# Altium PCB FATEK_OMRON_EXTENDED.PcbDoc
Units mil, origin at the board's own origin, x right, y up, seen from the top; angles counter-clockwise.
Board outline 1200 x 1975 mil, 2 copper layers (Top Layer, Bottom Layer); 5 components, 6 nets, 12 pads, 0 vias.
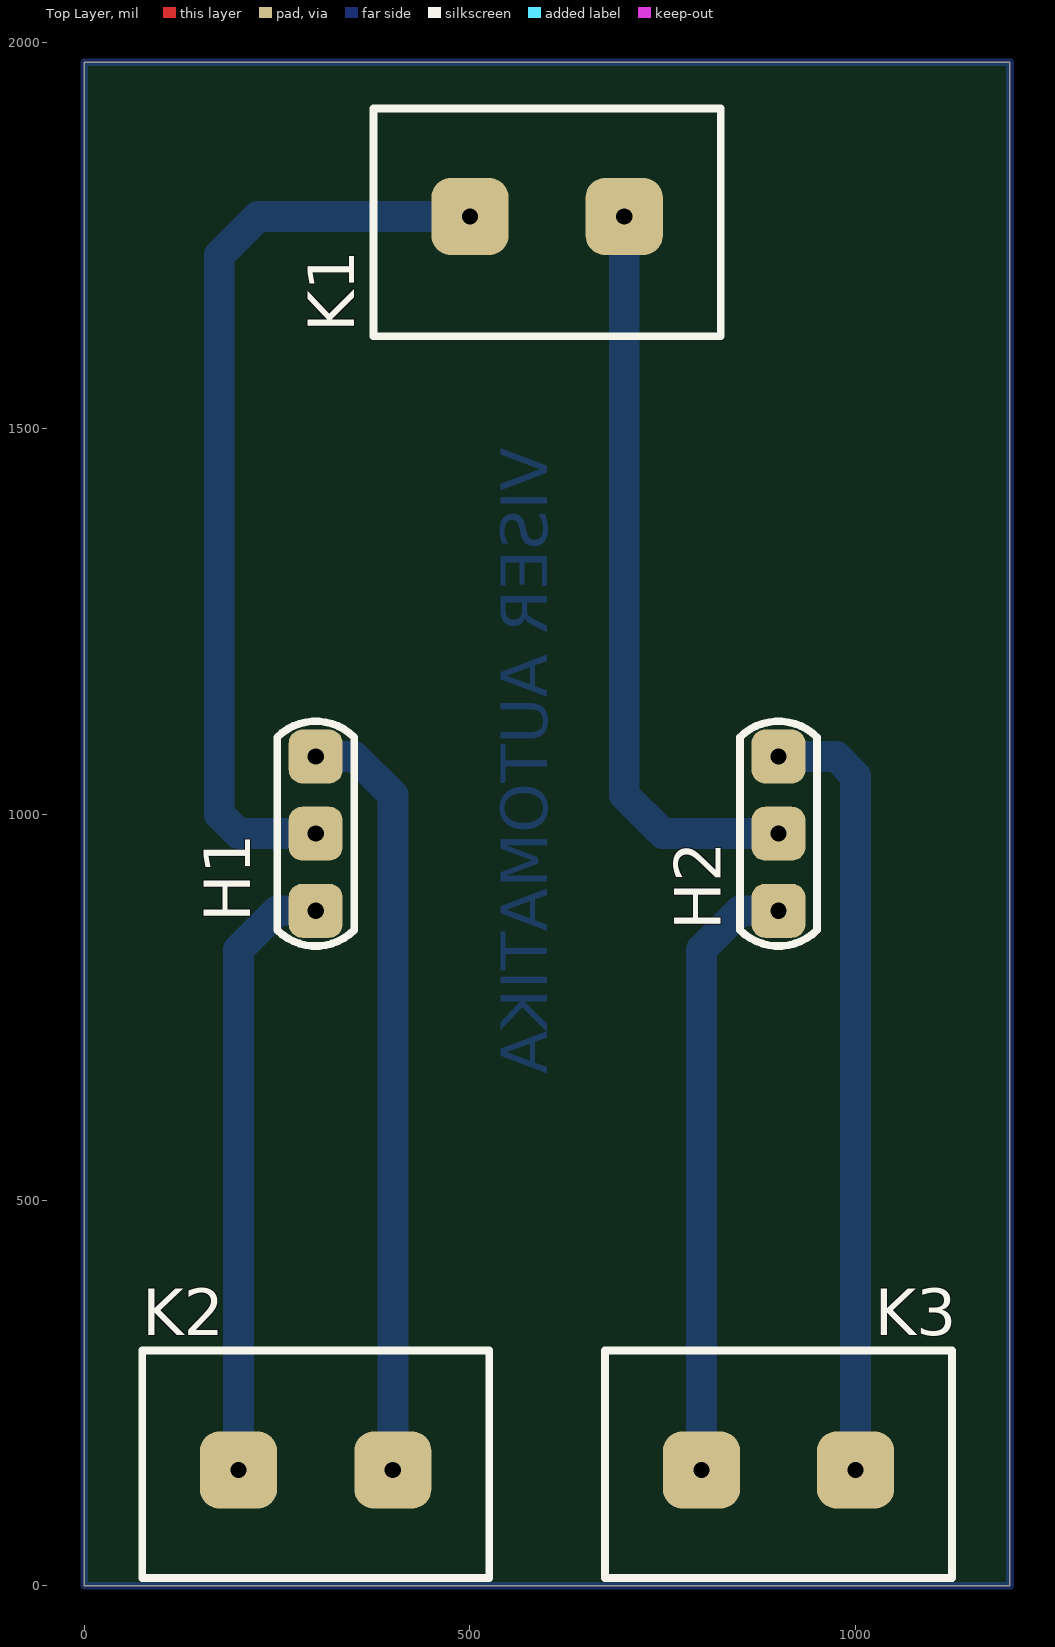
[diagram p0: Top Layer view]
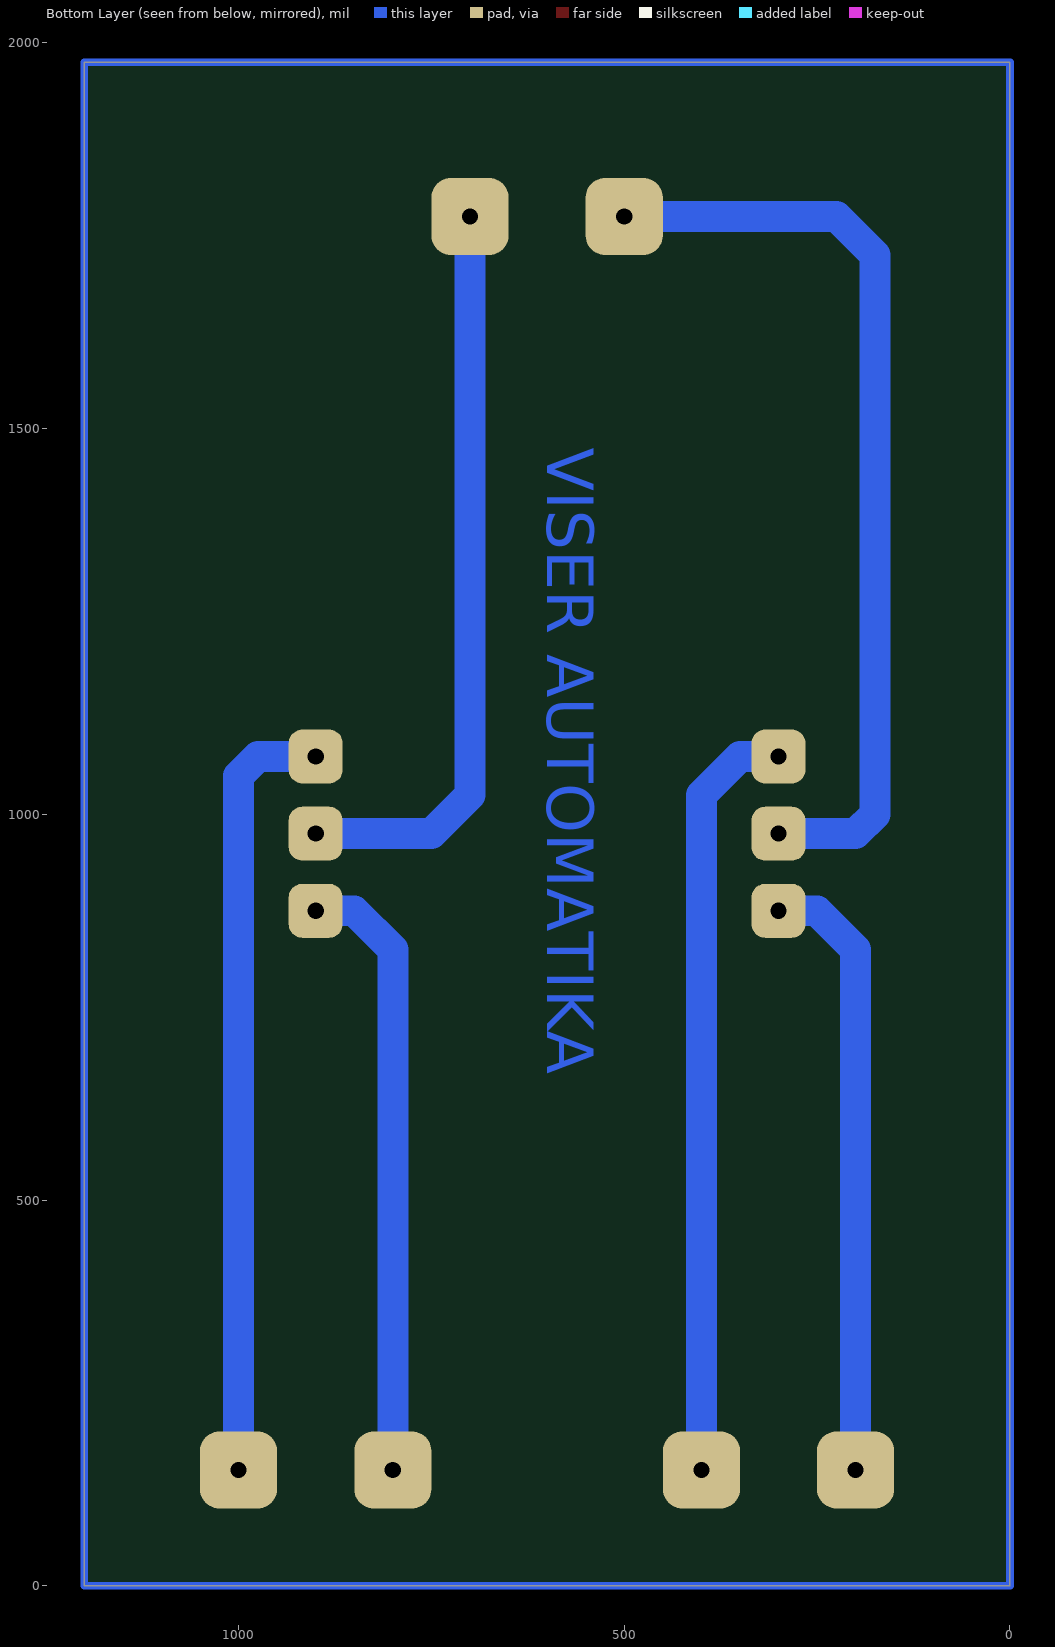
[diagram p1: Bottom Layer view, seen from below]
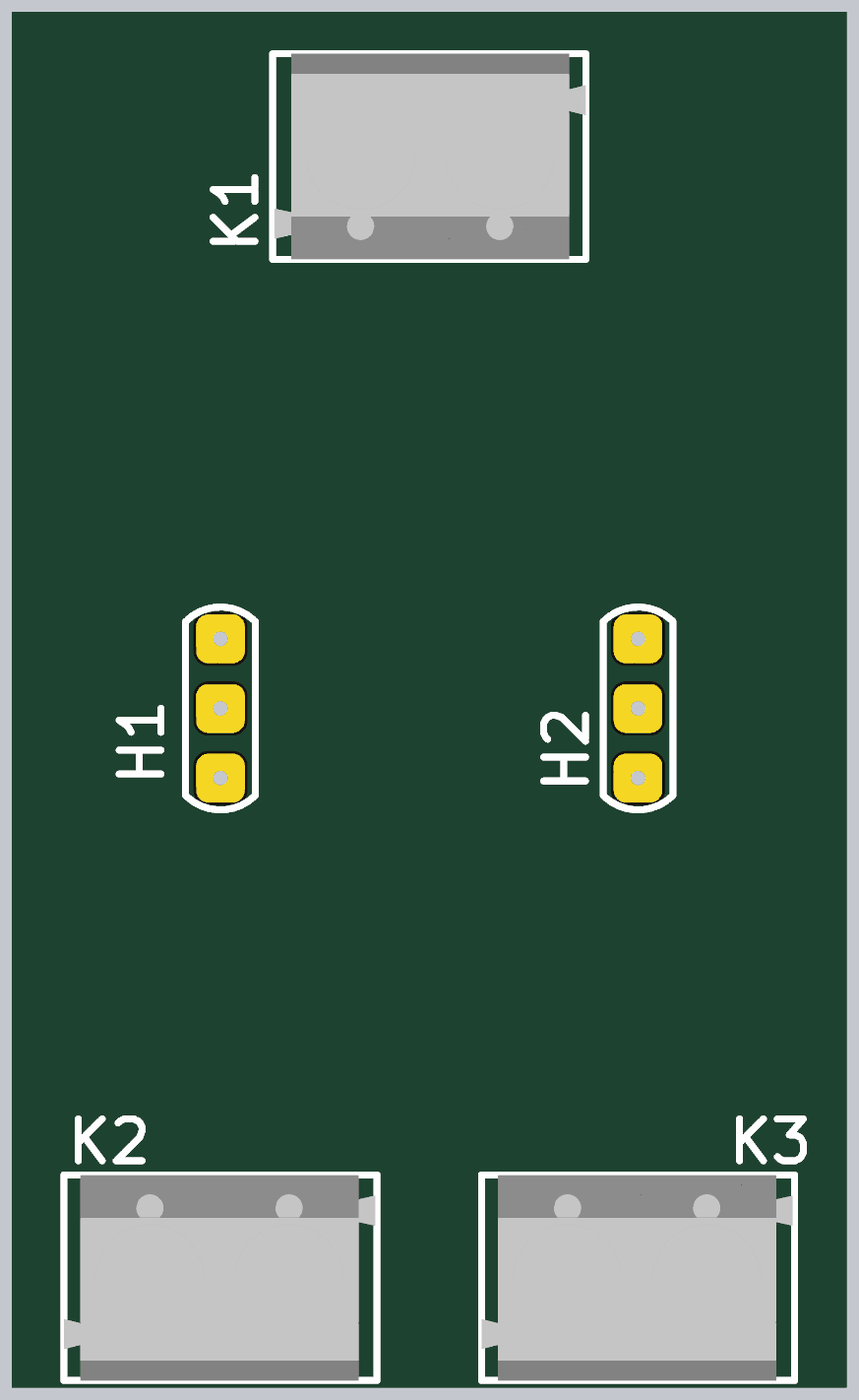
[diagram p2: 3D render of the assembled board from above, using the file's embedded part models]

## Layer stack, top to bottom
Top Solder: solder mask 0.4, Solder Resist, Dk 3.5
Top Layer: signal copper 1.4
Dielectric 1: dielectric 12.6, FR-4, Dk 4.8
Bottom Layer: signal copper 1.4
Bottom Solder: solder mask 0.4, Solder Resist, Dk 3.5

## Board outline
0,0 1200,0 1200,1975 0,1975

## Design rules (kind name [scope] priority, off if disabled: settings)
Clearance [All] p1: gap=10
PolygonConnect [All] p1: connectstyle=Relief reliefconductorwidth=10 reliefentries=4 polygonreliefangle="90 Angle" airgapwidth=10
RoutingVias [All] p1: holewidth=28 width=50 viastyle="Through Hole" minholewidth=28 minwidth=50 maxholewidth=28 maxwidth=50
SolderMaskExpansion [All] p1: expansion=4
UnpouredPolygon [All] p1: allowunpoured=FALSE
Width [All] p1: maxlimit=60 minlimit=10 preferedwidth=40 toplayer_maxwidth=10 toplayer_prefwidth=10 minimp=50.000000 maximp=50.000000 favimp=50.000000
29 further rules are at their usual default settings.

## Components (designator, comment, footprint, x,y, rotation, side; value= is the part's Value field where it differs from the comment)
H1 "Header 1x3" "Header 1x3" 300,875 r90 top
H2 "Header 1x3" "Header 1x3" 900,875 r90 top
K1 "Klema" Klema 500,1775 r0 top
K2 "Klema" Klema 400,150 r180 top
K3 "Klema" Klema 1000,150 r180 top

## Footprints (in the part's own frame and the unit in brackets; to place one, negate y for a bottom-side part, rotate by r counter-clockwise, add the part's x,y. Pads: shape width x height; smd on the part's side, far side on the other; paste and mask are expansions set on the pad)
"Header 1x3" [mil]
  rrect50% 70x70 hole 21: 1(0,0) 2(100,0) 3(200,0)
  silkscreen extent -46,-50 246,50
Klema [mil]
  rrect50% 100x100 hole 21: 1(0,0) 2(200,0)
  silkscreen extent -125,-155 325,140, body extent -122,-155 325,140, height 392

## Nets (pads, with @x,y where several pads share a name; then routed paths per layer and width w, separated by ;. In a path a pad name is that pad's centre, name@x,y a point inside that pad or via, vN(x,y) a via of type N, cw(c..) or ccw(c..) an arc to the next point about the centre after c; other vN are vias at no path point)
NetH1_1: H1.1 K2.2 | length 795.7
  Bottom Layer w40: K2.2 200,825 250,875 H1.1
NetH1_2: H1.2 K1.1 | length 1206.1
  Bottom Layer w40: H1.2 200,975 175,1000 175,1725 225,1775 K1.1
NetH1_3: H1.3 K2.1 | length 995.7
  Bottom Layer w40: H1.3 350,1075 400,1025 K2.1
NetH2_1: H2.1 K3.2 | length 795.7
  Bottom Layer w40: K3.2 800,825 850,875 H2.1
NetH2_2: H2.2 K1.2 | length 970.7
  Bottom Layer w40: K1.2 700,1025 750,975 H2.2
NetH2_3: H2.3 K3.1 | length 1010.4
  Bottom Layer w40: H2.3 975,1075 1000,1050 K3.1
copper on no net: | length 6350
  Bottom Layer w10: 0,0 1200,0 1200,1975 0,1975 0,0

## Other copper
Bottom Layer:
  text "VISER AUTOMATIKA" at 600,1475 h60 r90

## Silkscreen, mask and mechanical layers (free items; w line width, h text height)
Mechanical 1:
  lines w10: 0,0 0,0 ; 0,0 0,1975 ; 0,0 1200,0 1200,1975 0,1975 ; 0,1975 0,1975